# Altium PCB PCB1.PcbDoc
Units mm, origin at the board's own origin, x right, y up, seen from the top; angles counter-clockwise.
Board outline 152.4 x 101.6 mm, 2 copper layers (Top Layer, Bottom Layer); 10 components, 7 nets, 27 pads, 0 vias.
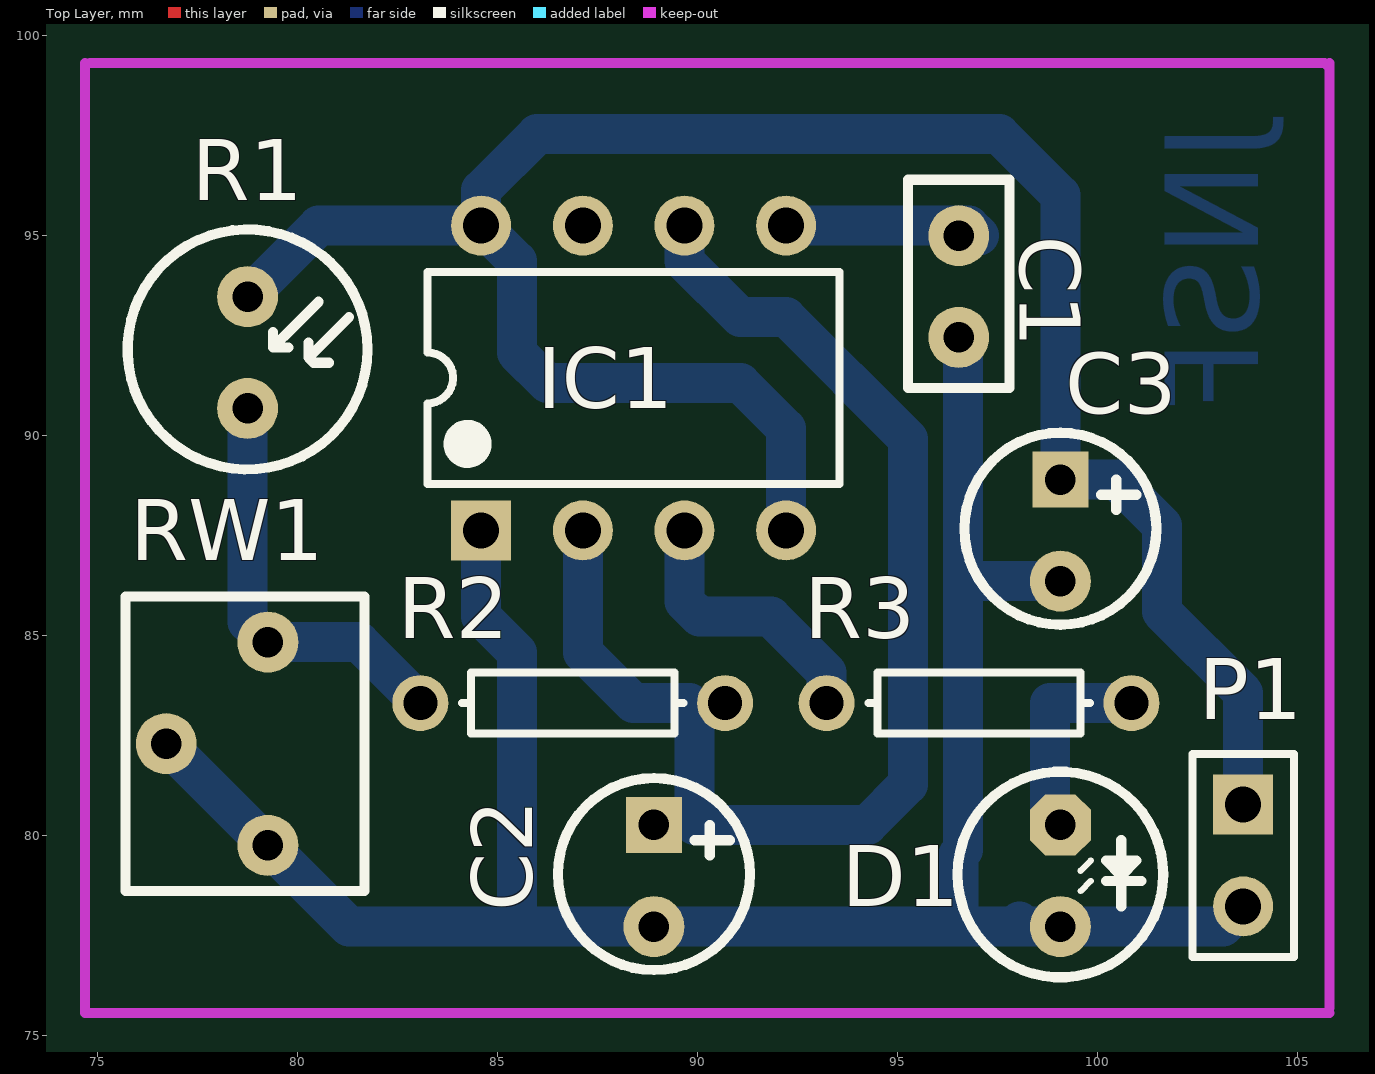
[diagram p0: Top Layer view]
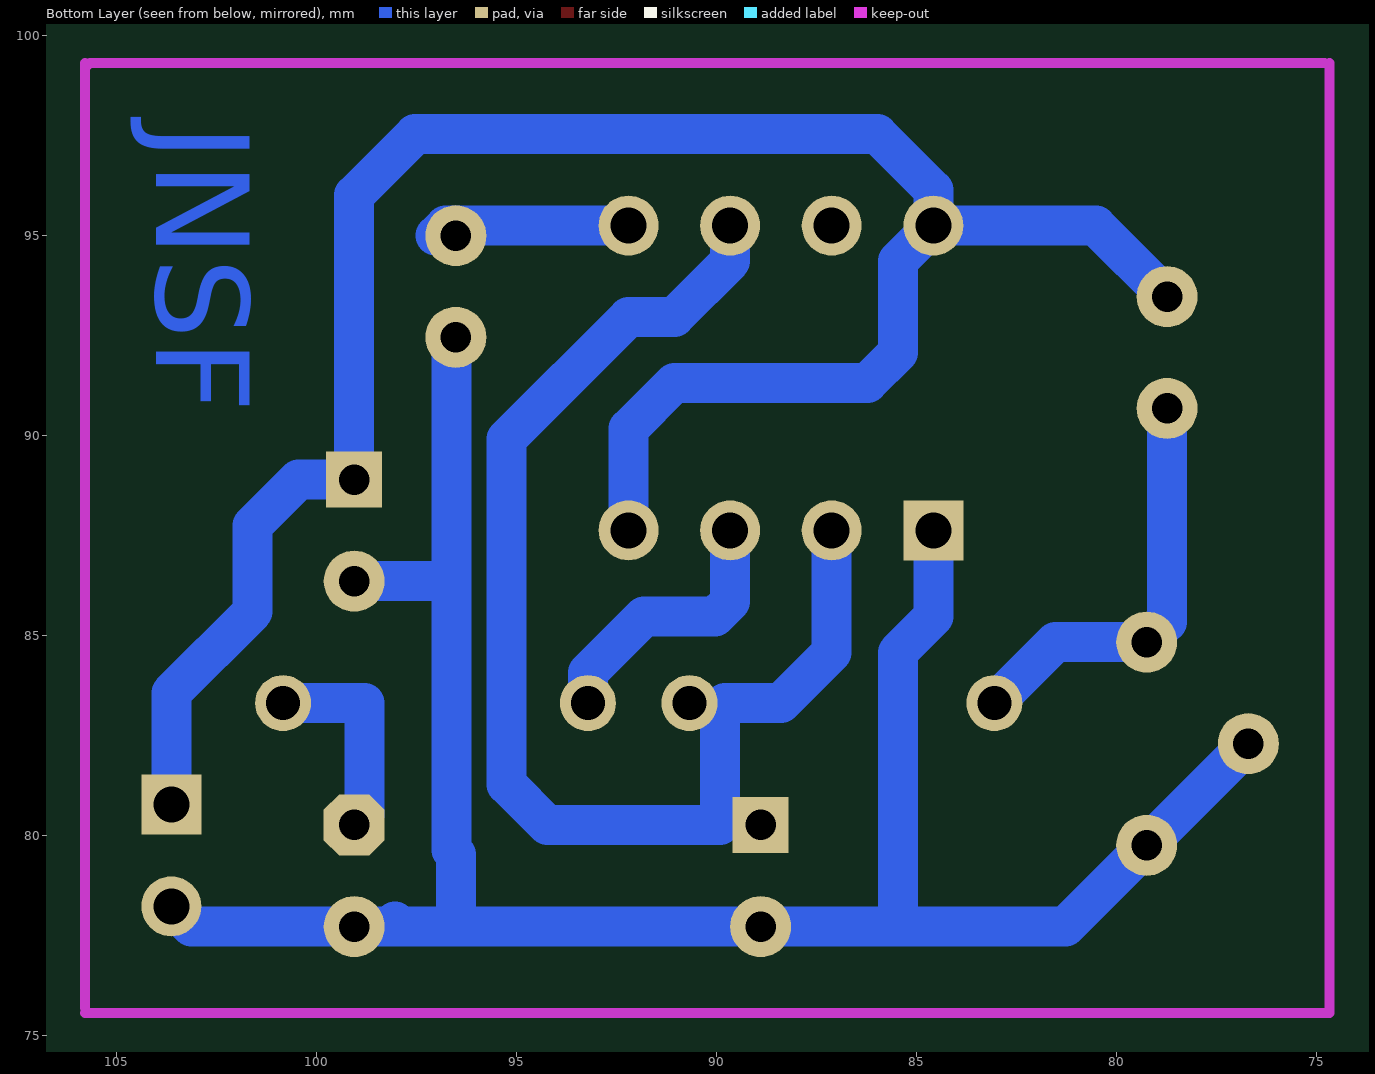
[diagram p1: Bottom Layer view, seen from below]

## Layer stack, top to bottom
Top Layer: signal copper 0.0356
Dielectric: dielectric 0.32, FR-4, Dk 4.8
Bottom Layer: signal copper 0.0356

## Board outline
25.4,25.4 177.8,25.4 177.8,127 25.4,127

## Design rules (kind name [scope] priority, off if disabled: settings)
Clearance [All] p1: gap=0.254
PolygonConnect [All] p1: connectstyle=Relief reliefconductorwidth=0.254 reliefentries=4 polygonreliefangle="90 Angle"
RoutingLayers [All] p1: top layer_v5=FALSE bottom layer_v5=TRUE
RoutingVias [All] p1: holewidth=0.711 width=1.27 viastyle="Through Hole" minholewidth=0.711 minwidth=1.27 maxholewidth=0.711 maxwidth=1.27
SilkscreenOverComponentPads [All] p1: minsilkscreentomaskgap=0.254
SolderMaskExpansion [All] p1: expansion=0.102
Width [All] p1: maxlimit=1 minlimit=0.5 preferedwidth=1
26 further rules are at their usual default settings.

## Components (designator, comment, footprint, x,y, rotation, side; value= is the part's Value field where it differs from the comment)
C1 "0.1U" RAD0.1 96.52,94.996 r270 top
C2 "10U" CF0.1 88.9,80.264 r270 top
C3 "100U" CF0.1 99.06,88.9 r270 top
D1 "LED0" LED 99.06,80.264 r270 top
IC1 "NE555" DIP-8 88.392,91.44 r90 top
P1 "DC" HDR1X2 103.632,80.772 r270 top
R1 "CDS" CDS 78.74,93.472 r270 top
R2 "47k" AXIAL-0.3 86.868,83.312 r0 top
R3 "1K" AXIAL-0.3 97.028,83.312 r180 top
RW1 "100k" RW1 79.248,84.836 r0 top

## Footprints (in the part's own frame and the unit in brackets; to place one, negate y for a bottom-side part, rotate by r counter-clockwise, add the part's x,y. Pads: shape width x height; smd on the part's side, far side on the other; paste and mask are expansions set on the pad)
AXIAL-0.3 [mm] "Axial Device, Thru-Hole; 2 Leads; 0.3 in Pin Spacing"
  round 1.4 hole 0.85: 1(-3.81,0) 2(3.81,0)
  silkscreen extent -2.77,-0.76 2.77,0.76
CDS [mil]
  round 60 hole 30: 1(0,0) 2(110,0)
  silkscreen extent -66,-118 170,118
CF0.1 [mil]
  rect 55.12x55.12 hole 30: 1(0,0)
  round 60 hole 30: 2(100,0)
  silkscreen extent -46,-94 143,94
DIP-8 [mm] "DIP; 8 Leads; Row Spacing 7.62 mm; Pitch 2.54 mm"
  rect 1.5x1.5 hole 0.9: 1(-3.81,3.81)
  round 1.5 hole 0.9: 2(-3.81,1.27) 3(-3.81,-1.27) 4(-3.81,-3.81) 5(3.81,-3.81) 6(3.81,-1.27) 7(3.81,1.27) 8(3.81,3.81)
  silkscreen extent -2.65,-5.15 2.65,5.15
HDR1X2 [mm] "Connector; Header; 2 Position"
  rect 1.5x1.5 hole 0.9: 1(0,0)
  round 1.5 hole 0.9: 2(2.54,0)
  silkscreen extent -1.27,-1.27 3.81,1.27
LED [mil]
  oct 60x60 hole 30: 1(0,0)
  round 60 hole 30: 2(100,0)
  silkscreen extent -52,-101 150,101
RAD0.1 [mil]
  round 60 hole 30: 1(0,0) 2(100,0)
  silkscreen extent -55,-50 150,50
RW1 [mil]
  round 60 hole 30: 1(0,0) 2(-100,-100) 3(0,-200)
  silkscreen extent -140,-245 95,45

## Part data
C1: library part Cap
C2 C3: library part "Cap Pol"
P1: library part "Header 2", "Header, 2-Pin"
R2 R3: library part Res, "Resistor"
RW1: library part RW1

## Nets (pads, with @x,y where several pads share a name; then routed paths per layer and width w, separated by ;. In a path a pad name is that pad's centre, name@x,y a point inside that pad or via, vN(x,y) a via of type N, cw(c..) or ccw(c..) an arc to the next point about the centre after c; other vN are vias at no path point)
GND: C1.2 C2.2 C3.2 D1.2 IC1.1 P1.2 RW1.2 RW1.3 | length 56.9
  Bottom Layer w1: RW1.2 RW1.3 81.28,77.724 85.344,77.724 ; IC1.1 84.582,85.471 85.471,84.582 85.471,77.851 85.344,77.724 ; C1.2 96.631,92.345 96.631,86.233 ; 98.044,77.851 98.171,77.724 ; C3.2 96.758,86.36 96.631,86.233 ; P1.2 103.124,77.724 D1.2 98.171,77.724 ; 85.344,77.724 C2.2 96.647,77.724 ; 96.631,86.233 96.631,79.634 96.52,79.523 96.52,77.851 96.647,77.724 ; 96.647,77.724 98.171,77.724
NetC1_1: C1.1 IC1.5 | length 4.9
  Bottom Layer w1: IC1.5 96.774,95.25 C1.1@97.028,94.996
NetC2_1: C2.1 IC1.2 IC1.6 R2.2 | length 32.1
  Bottom Layer w1: IC1.2 87.122,84.582 88.392,83.312 89.789,83.312 89.916,83.185 89.916,80.264 94.234,80.264 95.25,81.28 95.25,89.916 92.202,92.964 91.059,92.964 89.662,94.361 IC1.6
NetD1_1: D1.1 R3.1 | length 5.2
  Bottom Layer w1: D1.1 98.806,80.518 98.806,83.312 R3.1
NetIC1_3: IC1.3 R3.2 | length 6.8
  Bottom Layer w1: IC1.3 89.662,85.852 90.043,85.471 91.821,85.471 93.218,84.074 R3.2
NetR1_2: R1.2 R2.1 RW1.1 | length 10.5
  Bottom Layer w1: R1.2 78.74,85.344 RW1.1 81.534,84.836 R2.1
VCC: C3.1 IC1.4 IC1.8 P1.1 R1.1 | length 54.7
  Bottom Layer w1: R1.1 80.518,95.25 IC1.8 ; IC1.4 92.202,90.17 91.059,91.313 86.233,91.313 85.471,92.075 85.471,94.361 IC1.8 ; P1.1 103.632,83.566 101.6,85.598 101.6,87.757 100.457,88.9 C3.1 99.06,96.012 97.536,97.536 85.979,97.536 84.582,96.139 IC1.8
pads on no net: IC1.7

## Keep-outs
Keep-Out Layer:
  lines w0.254: 74.676,99.314 74.676,75.565 105.791,75.565 ; 74.803,99.314 105.664,99.314 105.791,99.187 ; 105.791,75.692 105.791,99.314

## Other copper
Bottom Layer:
  text "JNSF" at 104.775,97.79 h4 r90